# Altium PCB PCB_mezzanine_analog_template.PcbDoc (part 1 of 2)
Units mm, origin at the board's own origin, x right, y up, seen from the top; angles counter-clockwise.
Board outline 100.05 x 34.55 mm, 4 copper layers (Component Side, Ground Plane, Power Plane, Solder Side), stack 1.013 mm thick; 137 components, 101 nets, 470 pads, 426 vias.
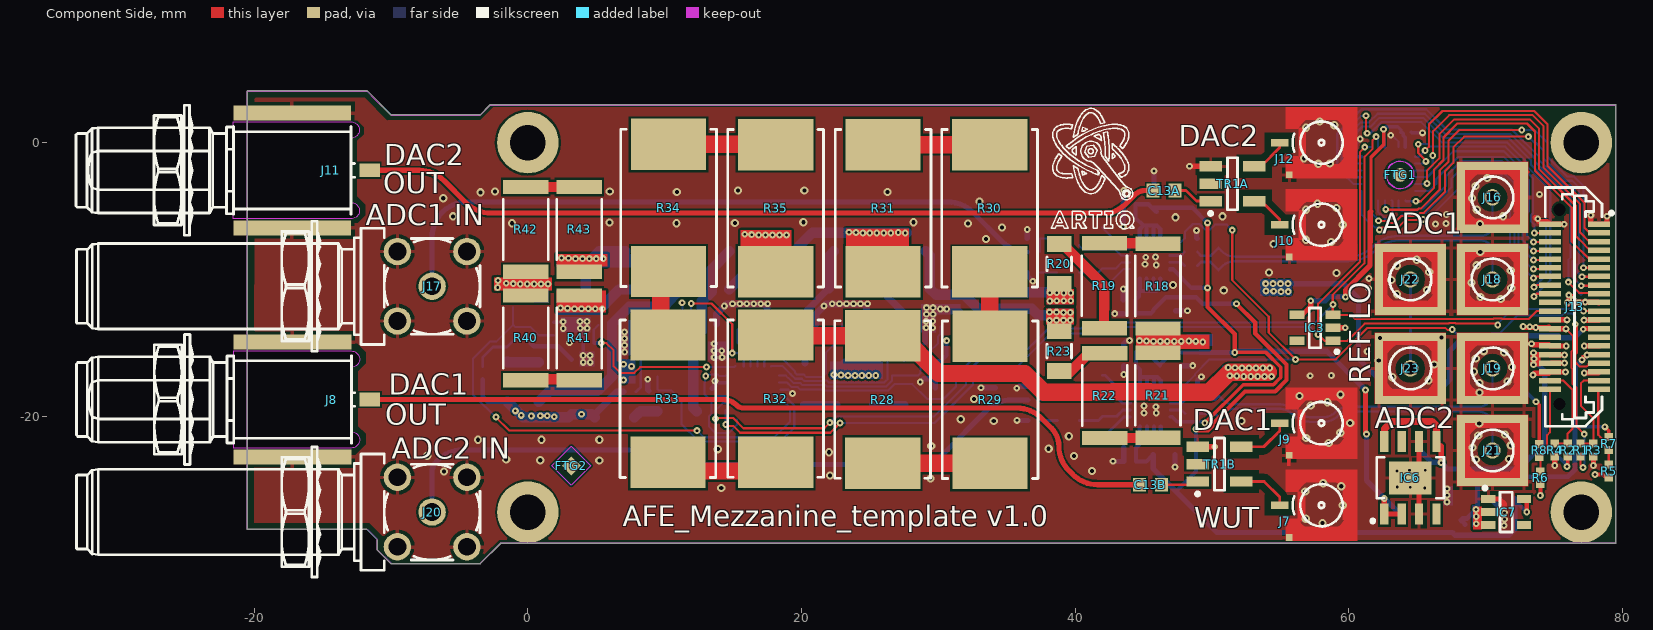
[diagram p0: Component Side view]
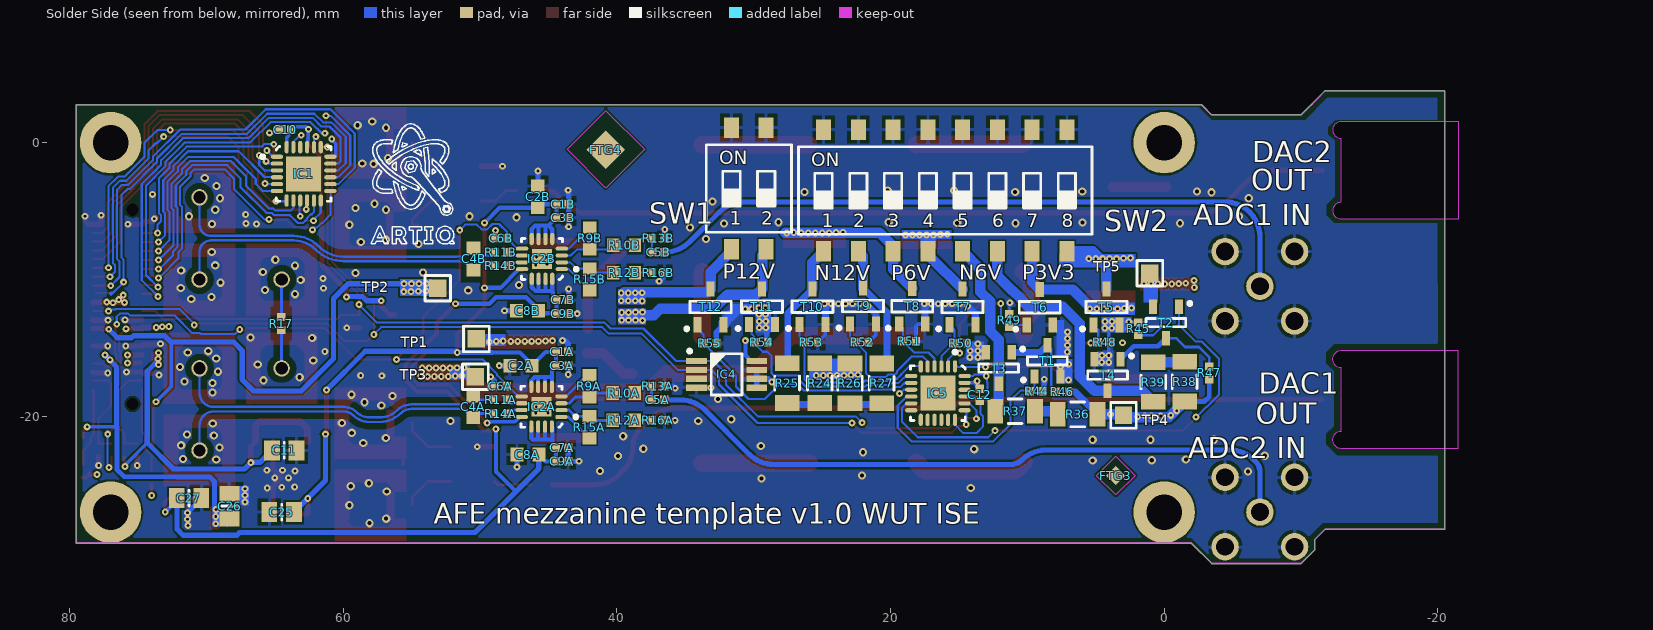
[diagram p1: Solder Side view, seen from below]
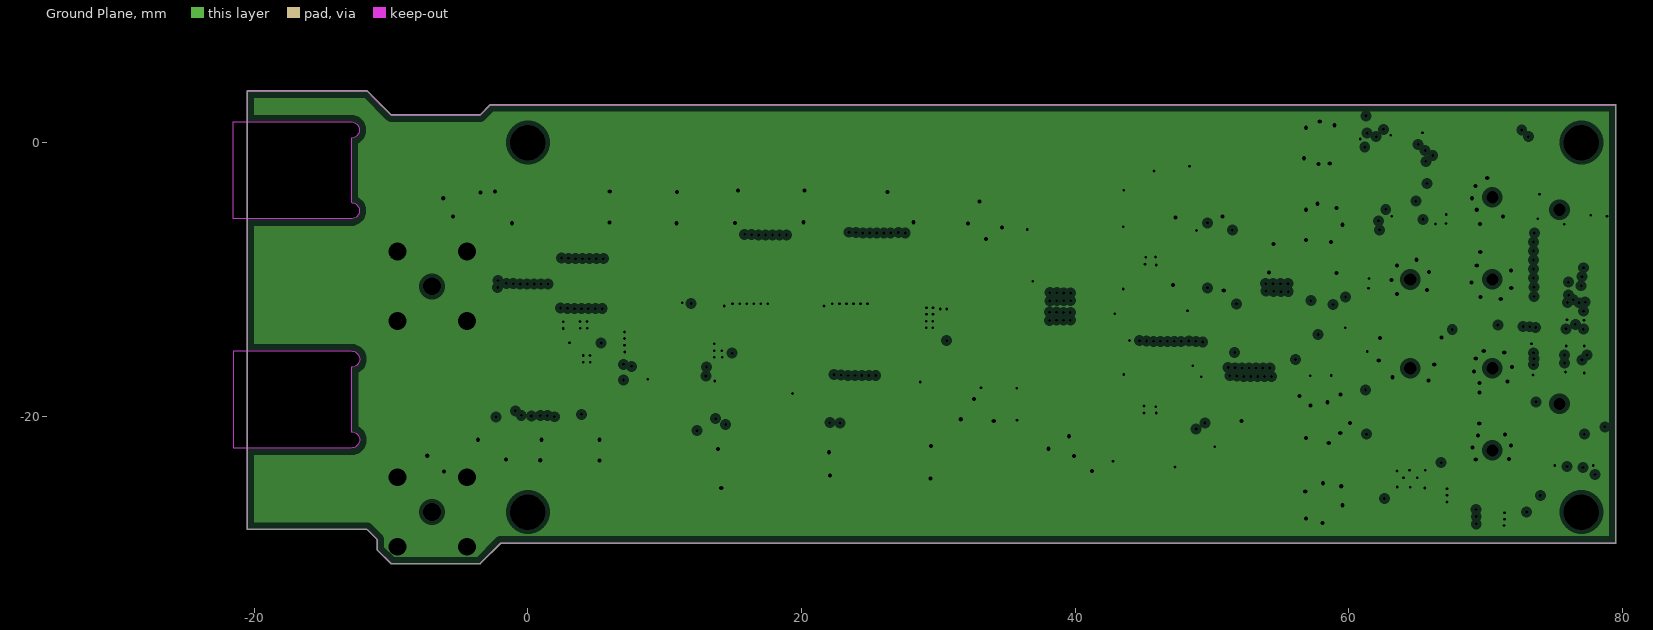
[diagram p2: Ground Plane, clearances drawn from the general rule]
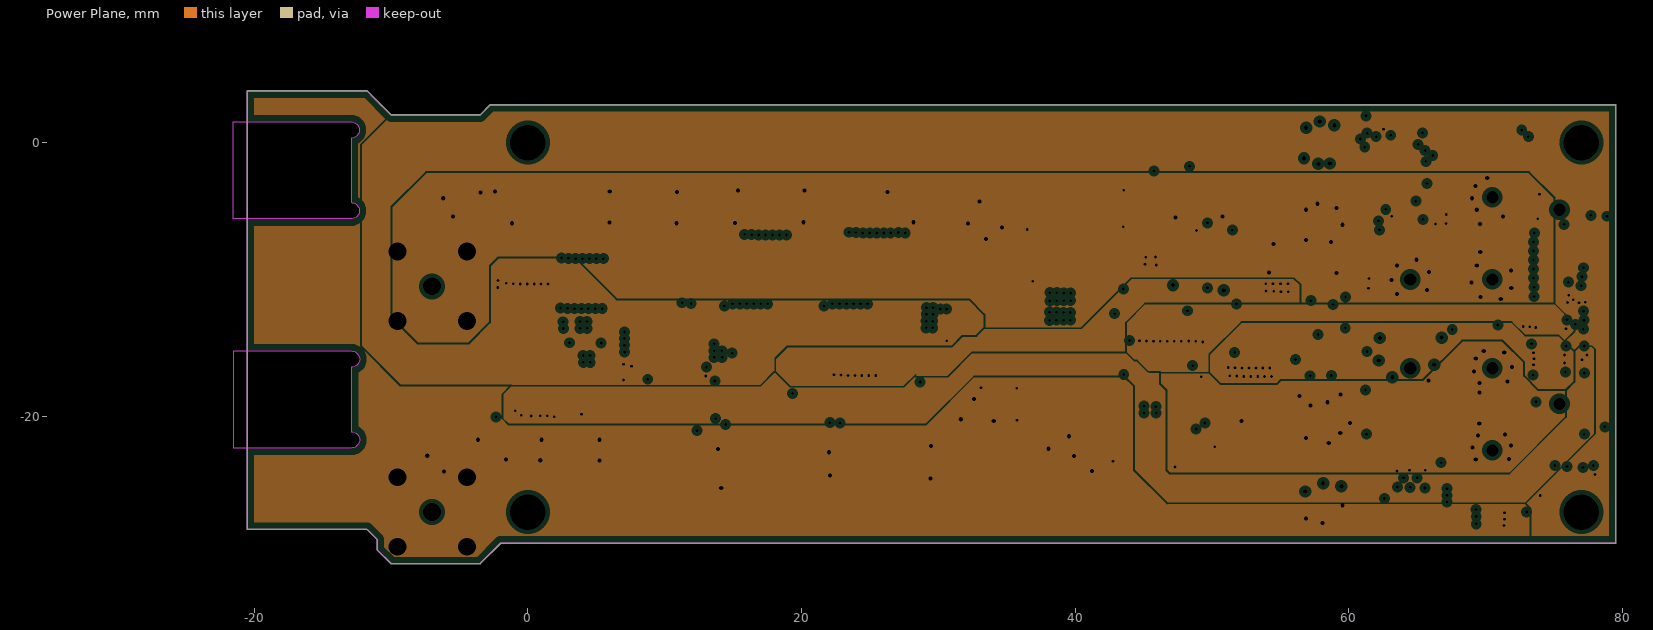
[diagram p3: Power Plane, clearances drawn from the general rule]
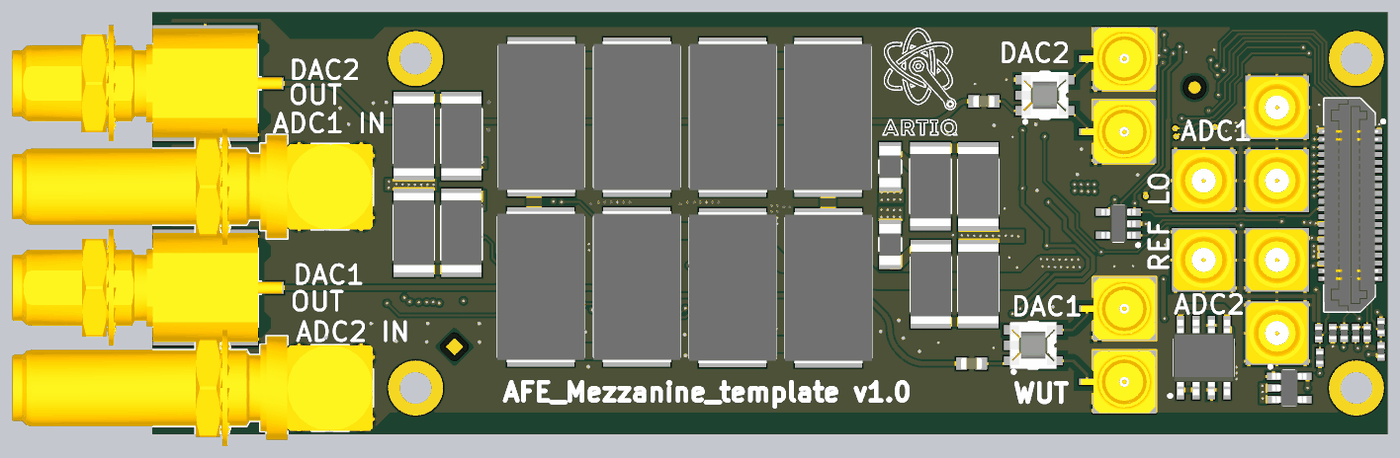
[diagram p5: 3D render of the assembled board from above, using the file's embedded part models]
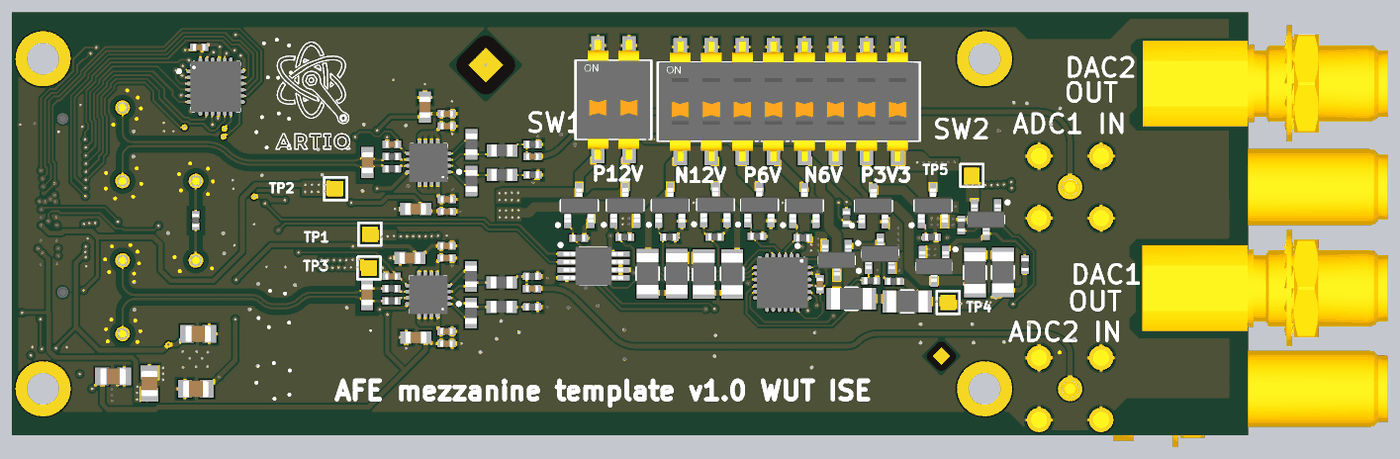
[diagram p6: 3D render of the assembled board from below, using the file's embedded part models]

## Layer stack, top to bottom
Top Solder: solder mask 0.0102, Solder Resist, Dk 3.5
Component Side: signal copper 0.035
Dielectric 1: core 0.2605, FR-4, Dk 4.8
Ground Plane: plane copper 0.035, net GND
Dielectric 3: prepreg 0.352, Dk 4.2
Power Plane: plane copper 0.035, net (Multiple Nets)
Dielectric 4: core 0.2605, Dk 4.2
Solder Side: signal copper 0.035
Bottom Solder: solder mask 0.0102, Solder Resist, Dk 3.5

## Board outline
-11.761,-28.275 -11.025,-29.011 -11.025,-29.75 ccw(c-11,-29.75) -11.018,-29.768 -10.018,-30.768 cw(c-10,-30.75) -10.018,-30.768 ccw(c-10,-30.75) -10,-30.775 -3.5,-30.775 ccw(c-3.5,-30.75) -3.482,-30.768 -1.989,-29.275 79.5,-29.275 ccw(c79.5,-29.25) 79.525,-29.25 79.525,2.75 ccw(c79.5,2.75) 79.5,2.775 -2.75,2.775 ccw(c-2.75,2.75) -2.768,2.768 cw(c-2.75,2.75) -2.768,2.768 -3.511,2.025 -9.989,2.025 -11.732,3.768 cw(c-11.75,3.75) -11.732,3.768 ccw(c-11.75,3.75) -11.75,3.775 -20.5,3.775 ccw(c-20.5,3.75) -20.525,3.75 -20.525,-28.25 ccw(c-20.5,-28.25) -20.5,-28.275

## Design rules (kind name [scope] priority, off if disabled: settings)
Clearance Clearance_1 [(InDifferentialPairClass('All Differential Pairs')) vs InNet('GND')] p1: gap=0.254 except(0.457: Arc-Poly Track-Poly SMDPad-Poly THPad-Poly)
Clearance [All] p2: gap=0.152
DiffPairsRouting [All] p1: maxlimit=0.254 minlimit=0.152 mostfreqgap=0.152 toplayer_minwidth=0.178 toplayer_maxwidth=0.381 toplayer_prefwidth=0.178 bottomlayer_minwidth=0.178 bottomlayer_maxwidth=0.381 bottomlayer_prefwidth=0.178 maxuncoupledlength=12.7
HoleSize [All] p1: absolutevalues=TRUE maxlimit=5 minlimit=0.2 maxpercent=80.000 minpercent=20.000
HoleToHoleClearance [All] p1: gap=0.2 allowstackedmicrovias=TRUE
MinimumSolderMaskSliver [All] p1 off: minsoldermaskwidth=0.05
PlaneClearance [All] p1: clearance=0.3
PlaneConnect [All] p1: planeconnectstyle=Direct reliefexpansion=0.508 reliefentries=4 reliefconductorwidth=0.254 reliefairgap=0.254
PolygonConnect PolygonConnect_pad [(InPadClass('All Pads'))] p1: connectstyle=Relief reliefconductorwidth=0.254 reliefentries=4 polygonreliefangle="90 Angle" airgapwidth=0.254
PolygonConnect [All] p2: connectstyle=Direct reliefconductorwidth=0.254 reliefentries=4 polygonreliefangle="45 Angle" airgapwidth=0.254
RoomDefinition PCB_mezzanine_analog_template [InComponentClass('PCB_mezzanine_analog_template ')] p1 off: confinementstyle=ConfineIn formatcopy=TRUE lockcomponents=FALSE outline 80.669,-29.387 108.634,-29.387 108.634,-20.903 80.669,-20.903
RoomDefinition U_ADC_channel2 [InComponentClass('U_ADC_channel2')] p2 off: confinementstyle=ConfineIn formatcopy=TRUE lockcomponents=FALSE outline 34.97,-3.5 52.97,-3.5 52.97,-13.5 34.97,-13.5
RoomDefinition U_ADC_channel1 [InComponentClass('U_ADC_channel1')] p3 off: confinementstyle=ConfineIn formatcopy=TRUE lockcomponents=FALSE outline 35,-14.3 53,-14.3 53,-24.3 35,-24.3
RoomDefinition U_DAC_channel2 [InComponentClass('U_DAC_channel2')] p4 off: confinementstyle=ConfineIn formatcopy=TRUE lockcomponents=FALSE outline 2.55,-30 53.55,-30 53.55,-18 2.55,-18
RoomDefinition U_DAC_channel1 [InComponentClass('U_DAC_channel1')] p5 off: confinementstyle=ConfineIn formatcopy=TRUE lockcomponents=FALSE outline 3.5,-9.5 54.5,-9.5 54.5,2.5 3.5,2.5
RoutingVias [All] p1: holewidth=0.2 width=0.5 viastyle="Through Hole" minholewidth=0.2 minwidth=0.5 maxholewidth=0.711 maxwidth=1.27
SilkToSilkClearance [All] p1: silktosilkclearance=0
SilkToSolderMaskClearance SilkscreenOverComponentPads [IsPad] p1: minsilkscreentomaskgap=0 clearancetoexposedcopper=TRUE
SolderMaskExpansion [All] p1: expansion=0.102
Width [All] p1: maxlimit=2.54 minlimit=0.127 preferedwidth=0.254
22 further rules are at their usual default settings.

## Classes and differential pairs
component class PCB_mezzanine_analog_template: C10 C11 C12 C25 C26 C27 FTG1 FTG2 FTG3 FTG4 IC1 IC3 IC4 IC5 IC6 IC7 J7 J8 J9 J10 J11 J12 J13 J16 J17 J18 J19 J20 J21 J22 J23 R1 R2 R3 R4 R5 R6 R7 R8 R17 R18 R19 R20 R21 R22 R23 R24 R25 R26 R27 R28 R29 R30 R31 R32 R33 R34 R35 R36 R37 R38 R39 R40 R41 R42 R43 R44 R45 R46 R47 R48 R49 R50 R51 R52 R53 R54 R55 SW1 SW2 T1 T2 T3 T4 T5 T6 T7 T8 T9 T10 T11 T12 TP1 TP2 TP3 TP4 TP5
channel class ADC_channel: U_ADC_channel1 U_ADC_channel2
channel class DAC_channel: U_DAC_channel1 U_DAC_channel2
component class U_ADC_channel1: C1A C2A C3A C4A C5A C6A C7A C8A C9A IC2A R9A R10A R11A R12A R13A R14A R15A R16A
component class U_ADC_channel2: C1B C2B C3B C4B C5B C6B C7B C8B C9B IC2B R9B R10B R11B R12B R13B R14B R15B R16B
component class U_DAC_channel1: C13A TR1A
component class U_DAC_channel2: C13B TR1B
differential pair ADC1_IN: +ADC1_IN_P -ADC1_IN_N
differential pair ADC2_IN: +ADC2_IN_P -ADC2_IN_N
differential pair DAC1_OUT: +DAC1_OUT_P -DAC1_OUT_N
differential pair DAC2_OUT: +DAC2_OUT_P -DAC2_OUT_N
differential pair LO_IN: +LO_IN_P -LO_IN_N

## Components (designator, comment, footprint, x,y, rotation, side; value= is the part's Value field where it differs from the comment)
C1A "100nF" CAPC1005X55N 44,-15.3 r0 bottom (schematic designator C1)
C1B "100nF" CAPC1005X55N 43.97,-4.5 r0 bottom (schematic designator C1)
C2A "10uF" CAPC1608X87N 47,-16.3 r180 bottom (schematic designator C2)
C2B "10uF" CAPC1608X87N 45.769,-3.957 r270 bottom (schematic designator C2)
C3A "1nF" CAPC1005X55N 44,-16.3 r0 bottom (schematic designator C3)
C3B "1nF" CAPC1005X55N 43.97,-5.5 r0 bottom (schematic designator C3)
C4A "10pF" CAPC1608X87N 50.5,-19.3 r90 bottom (schematic designator C4)
C4B "10pF" CAPC1608X87N 50.47,-8.5 r90 bottom (schematic designator C4)
C5A "100nF" CAPC1005X55N 37,-18.8 r180 bottom (schematic designator C5)
C5B "100nF" CAPC1005X55N 36.97,-8 r180 bottom (schematic designator C5)
C6A "100nF" CAPC1005X55N 48.5,-17.8 r180 bottom (schematic designator C6)
C6B "100nF" CAPC1005X55N 48.47,-7 r180 bottom (schematic designator C6)
C7A "100nF" CAPC1005X55N 44,-22.3 r0 bottom (schematic designator C7)
C7B "100nF" CAPC1005X55N 43.97,-11.5 r0 bottom (schematic designator C7)
C8A "10uF" CAPC1608X87N 46.5,-22.8 r180 bottom (schematic designator C8)
C8B "10uF" CAPC1608X87N 46.531,-12.288 r180 bottom (schematic designator C8)
C9A "1nF" CAPC1005X55N 44,-23.3 r0 bottom (schematic designator C9)
C9B "1nF" CAPC1005X55N 43.97,-12.5 r0 bottom (schematic designator C9)
C10 "100nF" CAPC1005X55N 64.235,0.945 r180 bottom
C11 "1uF" CAPC2012X140N 64.311,-22.499 r0 bottom
C12 "100nF" CAPC1005X55N 13.46,-18.429 r270 bottom
C13A "100nF" CAPC1608X87N 46.5,-3.5 r0 top (schematic designator C13)
C13B "100nF" CAPC1608X87N 45.5,-25 r0 top (schematic designator C13)
C25 "1uF" CAPC2012X140N 64.5,-27 r180 bottom
C26 "1uF" CAPC2012X140N 68.299,-26.563 r270 bottom
C27 "1uF" CAPC2012X140N 71.27,-25.98 r0 bottom
FTG1 "Use only in PCB" FIDUCIAL_TOP_C100-200 63.754,-2.362 r90 top
FTG2 "Use only in PCB" FIDUCIAL_TOP_S100-200 3.175,-23.622 r90 top
FTG3 "Use only in PCB" FIDUCIAL_TOP_S100-200 3.531,-24.333 r90 bottom
FTG4 "Use only in PCB" FIDUCIAL_TOP_S200-400 40.792,-0.508 r180 bottom
IC1 "TCA9539RTWR" QFN50P400X400X80-25N-S255 62.888,-2.281 r180 bottom
IC2A "ADA4927-1YCPZ-R2" QFN50P300X300X100-17N-S145 45.5,-19.3 r0 bottom (schematic designator IC2)
IC2B "ADA4927-1YCPZ-R2" QFN50P300X300X100-17N-S145 45.47,-8.5 r0 bottom (schematic designator IC2)
IC3 "24AA02E48T-I/OT" SOT95P280X145-5N 57.529,-13.533 r180 top
IC4 "LM75AIMM/NOPB" SOP65P490X109-8N 31.977,-16.937 r180 bottom
IC5 "TCA9539RTWR" QFN50P400X400X80-25N-S255 16.533,-18.308 r270 bottom
IC6 "ADP7102ARDZ-5.0-R7" SOIC127P600X175-9N-R241X309 64.5,-24.5 r90 top
IC7 "ADP7182AUJZ-5.0-R7" SOT95P280X90-5N 71.5,-27 r0 top
J7 "SMP" MOLEX_85305-0232 58,-26.5 r90 top locked
J8 "SMA" TELEGARTNER_J01151A0451 -11.55,-18.776 r180 top
J9 "SMP" MOLEX_85305-0232 58,-20.5 r90 top locked
J10 "SMP" MOLEX_85305-0232 58,-6 r90 top locked
J11 "SMA" TELEGARTNER_J01151A0451 -11.575,-2.025 r180 top
J12 "SMP" MOLEX_85305-0232 58,0 r90 top locked
J13 "Familly" SAMTEC_LSS-120-03-L-DV-A 76.5,-12 r90 top
J16 "SMP" AMPHENOL_SMP-MSLD-PCT-10 70.5,-4 r0 top
J17 "SMA" TELEGARTNER_J01151A0921 -7,-10.5 r0 top
J18 "SMP" AMPHENOL_SMP-MSLD-PCT-10 70.5,-10 r0 top
J19 "SMP" AMPHENOL_SMP-MSLD-PCT-10 70.5,-16.5 r0 top
J20 "SMA" TELEGARTNER_J01151A0921 -7,-27 r0 top
J21 "SMP" AMPHENOL_SMP-MSLD-PCT-10 70.5,-22.5 r0 top
J22 "SMP" AMPHENOL_SMP-MSLD-PCT-10 64.5,-10.003 r0 top locked
J23 "SMP" AMPHENOL_SMP-MSLD-PCT-10 64.5,-16.5 r0 top
R1 "10k" RESC1005X40N 76.935,-22.474 r270 top
R2 "10k" RESC1005X40N 75.995,-22.474 r270 top
R3 "1k" RESC1005X40N 77.874,-22.474 r90 top
R4 "1k" RESC1005X40N 75.055,-22.474 r90 top
R5 "1k" RESC1005X40N 79,-24 r90 top
R6 "1k" RESC1005X40N 74,-24.5 r90 top
R7 "10k" RESC1005X40N 79,-22 r90 top
R8 "10k" RESC1005X40N 73.912,-22.499 r90 top
R9A "332" RESC1608X55N 42,-17.8 r90 bottom (schematic designator R9)
R9B "332" RESC1608X55N 41.97,-7 r90 bottom (schematic designator R9)
R10A "332" RESC1608X55N 39.5,-18.3 r0 bottom (schematic designator R10)
R10B "332" RESC1608X55N 39.47,-7.5 r0 bottom (schematic designator R10)
R11A "49R9" RESC1005X40N 48.5,-18.8 r180 bottom (schematic designator R11)
R11B "49R9" RESC1005X40N 48.47,-8 r180 bottom (schematic designator R11)
R12A "332" RESC1608X55N 39.5,-20.3 r0 bottom (schematic designator R12)
R12B "332" RESC1608X55N 39.47,-9.5 r0 bottom (schematic designator R12)
R13A "56" RESC1005X40N 37,-17.8 r0 bottom (schematic designator R13)
R13B "56" RESC1005X40N 36.97,-7 r0 bottom (schematic designator R13)
R14A "49R9" RESC1005X40N 48.5,-19.8 r180 bottom (schematic designator R14)
R14B "49R9" RESC1005X40N 48.47,-9 r180 bottom (schematic designator R14)
R15A "332" RESC1608X55N 42,-20.8 r270 bottom (schematic designator R15)
R15B "332" RESC1608X55N 41.97,-10 r270 bottom (schematic designator R15)
R16A "56" RESC1005X40N 37,-20.3 r0 bottom (schematic designator R16)
R16B "56" RESC1005X40N 36.97,-9.5 r0 bottom (schematic designator R16)
R17 "100" RESC1005X40N 64.514,-13.228 r90 bottom
R18 "56" RESC6331X70N 46.048,-10.485 r90 top
R19 "56" RESC6331X70N 42.137,-10.46 r270 top
R20 "8R2" RESC3216X65N 38.835,-8.859 r270 top
R21 "56" RESC6331X70N 46.048,-18.462 r270 top
R22 "56" RESC6331X70N 42.162,-18.487 r90 top
R23 "8R2" RESC3216X65N 38.835,-15.235 r90 top
R24 "120" RESC3216X65N 25.169,-17.572 r270 bottom
R25 "120" RESC3216X65N 27.557,-17.572 r90 bottom
R26 "120" RESC3216X65N 22.96,-17.595 r270 bottom
R27 "120" RESC3216X65N 20.648,-17.597 r90 bottom
R28 "2" RESM11670X449N 25.931,-18.776 r270 top
R29 "2" RESM11670X449N 33.78,-18.791 r90 top
R30 "2" RESM11670X449N 33.755,-4.795 r90 top
R31 "2" RESM11670X449N 25.957,-4.795 r270 top
R32 "2" RESM11670X449N 18.108,-18.715 r270 top
R33 "2" RESM11670X449N 10.234,-18.716 r90 top
R34 "2" RESM11670X449N 10.285,-4.77 r90 top
R35 "2" RESM11670X449N 18.108,-4.795 r270 top
R36 "62" RESC3216X65N 6.323,-19.858 r0 bottom
R37 "62" RESC3216X65N 10.895,-19.629 r0 bottom
R38 "62" RESC3216X65N -1.501,-17.47 r90 bottom
R39 "62" RESC3216X65N 0.785,-17.495 r270 bottom
R40 "3R3" RESC6331X70N -0.154,-14.271 r270 top
R41 "3R3" RESC6331X70N 3.757,-14.271 r90 top
R42 "3R3" RESC6331X70N -0.154,-6.345 r90 top
R43 "3R3" RESC6331X70N 3.757,-6.345 r270 top
R44 "10k" RESC1005X40N 9.32,-18.156 r180 bottom
R45 "10k" RESC1005X40N 1.903,-13.609 r90 bottom
R46 "10k" RESC1005X40N 7.44,-18.207 r180 bottom
R47 "10k" RESC1005X40N -3.304,-16.835 r270 bottom
R48 "10k" RESC1005X40N 4.341,-14.6 r180 bottom
R49 "10k" RESC1005X40N 11.301,-13 r90 bottom
R50 "10k" RESC1005X40N 14.857,-14.651 r180 bottom
R51 "10k" RESC1005X40N 18.616,-14.524 r180 bottom
R52 "10k" RESC1005X40N 22.071,-14.574 r180 bottom
R53 "10k" RESC1005X40N 25.779,-14.6 r180 bottom
R54 "10k" RESC1005X40N 29.411,-14.6 r180 bottom
R55 "10k" RESC1005X40N 33.196,-14.676 r180 bottom
SW1 "Switch" SW_OMRON_A6S-2102-H 30.351,-3.353 r90 bottom
SW2 "Switch" SW_OMRON_A6S-8102-H 16,-3.5 r90 bottom
T1 "IRLML6402PBF" SOT95P237X112-3N 8.532,-15.946 r90 bottom
T2 "IRLML6402PBF" SOT95P237X112-3N -0.129,-13.152 r270 bottom
T3 "IRLML6402PBF" SOT95P237X112-3N 12.088,-16.479 r270 bottom
T4 "IRLML6402PBF" SOT95P237X112-3N 4.128,-16.994 r270 bottom
T5 "DMN2020LSN-7" SOT95P285X140-3N 4.214,-12.014 r90 bottom
T6 "DMN2020LSN-7" SOT95P285X140-3N 9.091,-12.034 r90 bottom
T7 "DMN2020LSN-7" SOT95P285X140-3N 14.73,-12.009 r90 bottom
T8 "DMN2020LSN-7" SOT95P285X140-3N 18.413,-11.958 r90 bottom
T9 "DMN2020LSN-7" SOT95P285X140-3N 22.009,-11.94 r90 bottom
T10 "DMN2020LSN-7" SOT95P285X140-3N 25.703,-11.984 r90 bottom
T11 "DMN2020LSN-7" SOT95P285X140-3N 29.386,-11.984 r90 bottom
T12 "DMN2020LSN-7" SOT95P285X140-3N 33.145,-12.009 r90 bottom
TP1 "Test Point" TPS127 50.265,-14.346 r180 bottom
TP2 "Test Point" TPS127 53.084,-10.637 r180 bottom
TP3 "Test Point" TPS127 50.341,-17.114 r180 bottom
TP4 "Test Point" TPS127 2.97,-19.934 r180 bottom
TP5 "Test Point" TPS127 1.039,-9.545 r180 bottom
TR1A "1:1" XFMR_MINI-CIRCUITS_AT224 51.5,-3 r90 top (schematic designator TR1)
TR1B "1:1" XFMR_MINI-CIRCUITS_AT224 50.55,-23.5 r90 top (schematic designator TR1)

## Footprints (in the part's own frame and the unit in brackets; to place one, negate y for a bottom-side part, rotate by r counter-clockwise, add the part's x,y. Pads: shape width x height; smd on the part's side, far side on the other; paste and mask are expansions set on the pad)
AMPHENOL_SMP-MSLD-PCT-10 [mm] "50 Ohm RF Connector, SMP Straight PCB Jack, Limited Detent, Surface Mount with Thru-Hole Contact"
  round 1.2 hole 0.9: 1(0,0)
  round 1.2 smd: 1(0,0)
  rect 0.6x5.2 smd: 2(-2.3,0) 2(2.3,0)
  rect 5.2x0.6 smd: 2(0,-2.3) 2(0,2.3)
  Component Side region: -2.6,-2.6 0,-2.6 0,-2 -0.868,-1.802 -1.564,-1.247 -1.95,-0.445 -1.95,0.445 -1.564,1.247 -0.868,1.802 0,2 0,2 0,2.6 -2.6,2.6
  Component Side region: 0,-2.6 2.6,-2.6 2.6,2.6 0,2.6 0,2 0.868,1.802 1.564,1.247 1.95,0.445 1.95,-0.445 1.564,-1.247 0.868,-1.802 0,-2 0,-2
  silkscreen extent -1.52,-1.52 1.53,1.52, body extent -2.5,-2.5 2.5,2.5, height 4.09
CAPC1005X55N [mm] "Chip Capacitor, Body 1.0x0.55mm, IPC Medium Density"
  rect 0.62x0.62 smd: 1(-0.45,0) 2(0.45,0)
  body extent -0.52,-0.27 0.53,0.28, height 0.55
CAPC1608X87N [mm] "Chip Capacitor, Body 1.6x0.8mm IPC Medium Density"
  rect 0.95x1 smd: 1(-0.8,0) 2(0.8,0)
  body extent -0.87,-0.47 0.88,0.48, height 0.87
CAPC2012X140N [mm] "Chip Capacitor, Body 2.0x1.25mm, IPC Medium Density"
  rect 1.15x1.45 smd: 1(-0.9,0) 2(0.9,0)
  silkscreen extent 0,-0.58 0,0.58, body extent -1.05,-0.67 1.05,0.68, height 1.3
FIDUCIAL_TOP_C100-200 [mm] "Round Fiducial Target, Top Layer, 1.0mm, Top Solder 2.0mm, Keepout =2.0mm"
  round 1 smd paste-0.51 mask+0.5: FTG2(0,0)
  Component Side keep-out circle w0.1: c0,0 r1
FIDUCIAL_TOP_S100-200 [mm] "Square Fiducial Target, Top Layer, 1.0mm, Top Solder 2.0mm, Keepout =2.0mm"
  rect 1x1 smd rot 45 paste-0.51 mask+0.5: 1(0,0)
  Component Side keep-out region: 1.414,0 0,-1.414 -1.414,0 0,1.414
FIDUCIAL_TOP_S200-400 [mm] "Square Fiducial Target, Top Layer, 2.0mm, Top Solder 4.0mm, Keepout =4.0mm"
  rect 2x2 smd rot 45 paste-0.9 mask+1: 1(0,0)
  Component Side keep-out region: -2.839,0.011 -0.011,2.839 2.818,0.011 -0.011,-2.818
MOLEX_85305-0232 [mm] "50 Ohms, SMP Surface Mount Plug, Limited Detent"
  rect 0.54x1.3 smd: 1(0,3.05)
  rect 0.5x0.5 smd paste-0.25 mask-0.25: 2(-2.35,2.35)
  Component Side region: -2.6,-2.6 -2.6,2.6 -1,2.6 -1,1.732 -1.732,1 -2,0 -1.732,-1 -1,-1.732 0,-2 1,-1.732 1.732,-1 2,0 1.732,1 1,1.732 1,1.732 1,2.6 2.6,2.6 2.6,-2.6
  silkscreen extent -1.55,-1.55 1.55,2.1, body extent -2.54,-2.54 2.54,3.54, height 4.1
QFN50P300X300X100-17N-S145 [mm] "QFN,0.50mm Pitch, Square; 4 Pin X 4 Pin, 3mm X 3mm X 1.00mm H Body (w/Thermal Tab 1.45 X 1.45mm), IPC Medium Density"
  oval 0.9x0.3 smd: 1(-1.45,0.75) 2(-1.45,0.25) 3(-1.45,-0.25) 4(-1.45,-0.75) 9(1.45,-0.75) 10(1.45,-0.25) 11(1.45,0.25) 12(1.45,0.75)
  oval 0.3x0.9 smd: 5(-0.75,-1.45) 6(-0.25,-1.45) 7(0.25,-1.45) 8(0.75,-1.45) 13(0.75,1.45) 14(0.25,1.45) 15(-0.25,1.45) 16(-0.75,1.45)
  rect 1.45x1.45 smd: 17(0,0)
  silkscreen extent -2.62,-1.5 1.5,1.5, body extent -1.57,-1.57 1.58,1.58, height 1
QFN50P400X400X80-25N-S255 [mm] "QFN, 0.50mm Pitch, Square; 6 Pin X 6 Pin, 4mm X 4mm Body (w/Thermal Tab 2.55 X 2.55 mm), IPC Medium Density"
  oval 0.9x0.3 smd: 1(-1.95,1.25) 2(-1.95,0.75) 3(-1.95,0.25) 4(-1.95,-0.25) 5(-1.95,-0.75) 6(-1.95,-1.25) 13(1.95,-1.25) 14(1.95,-0.75) 15(1.95,-0.25) 16(1.95,0.25) 17(1.95,0.75) 18(1.95,1.25)
  oval 0.3x0.9 smd: 7(-1.25,-1.95) 8(-0.75,-1.95) 9(-0.25,-1.95) 10(0.25,-1.95) 11(0.75,-1.95) 12(1.25,-1.95) 19(1.25,1.95) 20(0.75,1.95) 21(0.25,1.95) 22(-0.25,1.95) 23(-0.75,1.95) 24(-1.25,1.95)
  rect 2.55x2.55 smd: 25(0,0)
  silkscreen extent -3.13,-2 2,2, body extent -2.07,-2.07 2.08,2.08, height 0.8
RESC1005X40N [mm] "Chip Resistor, EIA 0402, Metric 1005, Body 1.0x0.5mm, IPC Medium Density"
  rect 0.58x0.62 smd: 1(-0.47,0) 2(0.47,0)
  body extent -0.52,-0.27 0.53,0.28, height 0.4
RESC1608X55N [mm] "Chip Resistor, EIA 0603, Metric 1608, Body 1.6x0.8mm, IPC Medium Density"
  rect 0.9x1 smd: 1(-0.8,0) 2(0.8,0)
  body extent -0.87,-0.47 0.88,0.48, height 0.55
RESC3216X65N [mm] "Chip Resistor, EIA 1206, Metric 3216, Body 3.2x1.6mm, IPC Medium Density"
  rect 1.15x1.8 smd: 1(-1.45,0) 2(1.45,0)
  silkscreen extent -0.5,-0.9 0.5,0.9, body extent -1.67,-0.87 1.68,0.88, height 0.65
RESC6331X70N [mm] "Chip Resistor, EIA 2512, Metric 6331, 2-Leads, Body 6.3x3.1mm, IPC Medium Density"
  rect 1.05x3.3 smd: 1(-3.1,0) 2(3.1,0)
  silkscreen extent -2.2,-1.65 2.2,1.65, body extent -3.25,-1.65 3.25,1.65, height 0.7
RESM11670X449N [mm] "Resistor, Molded Body; 11.56mm L X 6.98mm W X 4.49mm H, IPC Medium Density"
  rect 3.75x5.5 smd: 1(-4.65,0) 2(4.65,0)
  silkscreen extent -5.75,-3.5 5.75,3.5, body extent -6.19,-3.55 6.19,3.55, height 4.49
SAMTEC_LSS-120-03-L-DV-A [mm] "40 Contacts, Pitch 0.635mm, Razor Beam LSS Vertical High Speed Hermaphroditic Strip (Lead Style 5.49mm)"
  rect 0.4x1.6 smd: 1(6.032,-1.8) 2(6.032,1.8) 3(5.397,-1.8) 4(5.397,1.8) 5(4.763,-1.8) 6(4.763,1.8) 7(4.127,-1.8) 8(4.127,1.8) 9(3.492,-1.8) 10(3.492,1.8) 11(2.857,-1.8) 12(2.857,1.8) 13(2.222,-1.8) 14(2.222,1.8) 15(1.588,-1.8) 16(1.587,1.8) 17(0.953,-1.8) 18(0.952,1.8) 19(0.318,-1.8) 20(0.317,1.8) 21(-0.317,-1.8) 22(-0.318,1.8) 23(-0.952,-1.8) 24(-0.953,1.8) 25(-1.587,-1.8) 26(-1.588,1.8) 27(-2.222,-1.8) 28(-2.222,1.8) 29(-2.857,-1.8) 30(-2.857,1.8) 31(-3.492,-1.8) 32(-3.492,1.8) 33(-4.127,-1.8) 34(-4.127,1.8) 35(-4.763,-1.8) 36(-4.763,1.8) 37(-5.397,-1.8) 38(-5.397,1.8) 39(-6.032,-1.8) 40(-6.032,1.8)
  round 0.5 hole 0.9 unplated mask+0.2: P1(-7.1,1.1) P2(7.1,1.1)
  silkscreen extent -8.72,-2.83 8.72,2.14, body extent -8.72,-2.3 8.73,2.3, height 5.3
SOIC127P600X175-9N-R241X309 [mm] "SOIC 8, Pitch 1.27mm - Body 3.9x4.9mm, (w/thermal tab 2.41mm X 3.098mm), IPC Medium Density"
  rect 1.55x0.6 smd: 1(-2.65,1.905) 2(-2.65,0.635) 3(-2.65,-0.635) 4(-2.65,-1.905) 5(2.65,-1.905) 6(2.65,-0.635) 7(2.65,0.635) 8(2.65,1.905)
  rect 2.41x3.098 smd: 9(0,0)
  silkscreen extent -3.27,-2.45 1.5,2.87, body extent -3.1,-2.5 3.1,2.5, height 1.75
SOP65P490X109-8N [mm] "SOP, 0.65mm pitch; 8 pin,3.00mm W X 3.00mm L X 1.09mm H bodyI, PC Medium Density"
  rect 1.5x0.45 smd: 1(-2.2,0.975) 2(-2.2,0.325) 3(-2.2,-0.325) 4(-2.2,-0.975) 5(2.2,-0.975) 6(2.2,-0.325) 7(2.2,0.325) 8(2.2,0.975)
  silkscreen extent -2.83,-1.5 1.12,1.82, body extent -2.45,-1.55 2.45,1.55, height 1.09
SOT95P237X112-3N [mm] "SOT, 0.95mm, pitch; 3 pin,1.30mm W X 2.92mm L X 1.12mm H body, IPC Medium Density"
  rect 1.05x0.6 smd: 1(-1.15,0.95) 2(-1.15,-0.95) 3(1.15,0)
  silkscreen extent -1.52,-1.45 0.3,1.88, body extent -1.25,-1.5 1.25,1.5, height 1.1
SOT95P280X90-5N [mm] "SOT, 0.95mm Pitch; 5 Pin, 1.60mm W X 2.90mm L X 0.90mm H body, IPC Medium"
  rect 1.05x0.6 smd: 1(-1.3,0.95) 2(-1.3,0) 3(-1.3,-0.95) 4(1.3,-0.95) 5(1.3,0.95)
  silkscreen extent -1.67,-1.45 0.45,1.87, body extent -1.4,-1.5 1.4,1.5, height 0.9
SOT95P280X145-5N [mm] "SOT, 0.95mm pitch; 5 pin, 1.60mm W X 2.90mm L X 1.45mm H body, IPC Medium Density"
  rect 1.1x0.6 smd: 1(-1.3,0.95) 2(-1.3,0) 3(-1.3,-0.95) 4(1.3,-0.95) 5(1.3,0.95)
  silkscreen extent -1.73,-1.45 0.43,1.87, body extent -1.4,-1.5 1.4,1.5, height 1.45
SOT95P285X140-3N [mm] "SOT23, 0.95mm Pitch; 3 Pin, 1.6mm W X 3mm L X 1.4mm H Body, IPC Medium Density"
  rect 1.1x0.6 smd: 1(-1.3,0.95) 2(-1.3,-0.95) 3(1.3,0)
  silkscreen extent -1.72,-1.5 0.43,1.88, body extent -1.4,-1.5 1.4,1.5, height 1.4
SW_OMRON_A6S-2102-H [mm] "Pitch 2.54mm, Body 6.2x6.4mm, 2 Ways SPST Surface-Mounting DIP Switch, OMRON A6S-H"
  rect 1.5x1.1 smd: 1(-4.45,1.27) 2(-4.45,-1.27) 3(4.45,-1.27) 4(4.45,1.27)
  silkscreen extent -3.2,-3.11 3.2,3.11, body extent -4.9,-3.01 4.9,3.01, height 3.97
SW_OMRON_A6S-8102-H [mm] "Pitch 2.54mm, Body 21.5x6.4mm, 8 Ways SPST Surface-Mounting DIP Switch, OMRON A6S-H"
  rect 1.5x1.1 smd: 1(-4.45,8.89) 2(-4.45,6.35) 3(-4.45,3.81) 4(-4.45,1.27) 5(-4.45,-1.27) 6(-4.45,-3.81) 7(-4.45,-6.35) 8(-4.45,-8.89) 9(4.45,-8.89) 10(4.45,-6.35) 11(4.45,-3.81) 12(4.45,-1.27) 13(4.45,1.27) 14(4.45,3.81) 15(4.45,6.35) 16(4.45,8.89)
  silkscreen extent -3.2,-10.73 3.2,10.73, body extent -4.9,-10.63 4.9,10.63, height 3.85
TELEGARTNER_J01151A0451 [mm] "SMA 50 ohm Edge Mount Bulkhead Jack Receptacle"
  rect 1.5x1 smd: 1(0,0)
  rect 8.6x1.1 smd: 2(5.65,4.2) 2(5.65,-4.2)
  Keep-Out Layer board cut-out: 1.35,-3.55 1.09,-3.491 0.881,-3.324 0.765,-3.084 0.765,-2.816 0.881,-2.576 1.09,-2.409 1.35,-2.35 1.35,-2.35 1.35,2.35 1.09,2.409 0.881,2.576 0.765,2.816 0.765,3.084 0.881,3.324 1.09,3.491 1.35,3.55 1.35,3.55 9.95,3.55 9.95,-3.55
  silkscreen extent 1.1,-4.75 21.45,4.75, body extent -0.65,-4.75 21.45,4.75, height 5.25
TELEGARTNER_J01151A0921 [mm] "50 Ohm SMA Right Angle PCB Jack"
  round 2 hole 1.3: 1(0,0) 2(-2.54,-2.54) 2(-2.54,2.54) 2(2.54,-2.54) 2(2.54,2.54)
  silkscreen extent -26,-4.75 3.5,4.75, body extent -26,-4.75 3.5,4.75, height 11.15
TPS127 [mm] "1.27 x  1.27mm SMD Test Point Area"
  rect 1.27x1.27 smd paste-1.27: 1(0,0)
  silkscreen extent -0.94,-0.94 0.94,0.94
XFMR_MINI-CIRCUITS_AT224 [mm] "MINI-CIRCUITS RF Transformer, Case AT224 - Body 3.81X3.81mm"
  rect 0.76x1.65 smd: 1(-1.27,1.59) 2(0,1.59) 3(1.27,1.59) 4(1.27,-1.59) 6(-1.27,-1.59)
  silkscreen extent -2.3,-0.37 1.91,1.72, body extent -1.9,-1.9 1.91,1.91, height 3.81

## Part data
C1A C1B C5A C5B C6A C6B C7A C7B C10 C12: library part CC0402_100NF_16V_10%_X5R, "Non-polarised capacitor"
C2A C2B C8A C8B: library part CC0603_10UF_6.3V_20%_X5R, "Non-polarised capacitor"
C3A C3B C9A C9B: library part CC0402_1NF_50V_10%_X7R, "Non-polarised capacitor"
C4A C4B: library part CC0603_10PF_50V_5%_NP0, "Non-polarised capacitor"
C11 C25 C26 C27: library part CC0805_1UF_35V_20%_X7R, "Non-polarised capacitor"
C13A C13B: library part CC0603_100NF_50V_10%_X7R, "Non-polarised capacitor"
FTG1: library part FIDUCIAL_TARGET_C100-200, "Fiducial Target"
FTG2 FTG3: library part FIDUCIAL_TARGET_S100-200, "Fiducial Target"
FTG4: library part FIDUCIAL_TARGET_S200-400, "Fiducial Target"
IC1 IC5: "Low-Voltage 16-Bit I2C and SMBus I/O Expander"
IC2A IC2B: "Ultralow Distortion Current Feedback Differential ADC Driver"
IC3: "1.7V-5.5V, 2K I2C Serial EEPROM With EUI-48 Node Identity"
IC4: "Digital Temperature Sensor and Thermal Watchdog with Two-Wire Interface"
IC6: "300 mA, Low Noise, CMOS LDO Linear Regulator"
IC7: "–5V, 200 mA, Low Noise, Linear Regulator"
J7 J9 J10 J12: library part MOLEX_85305-0232
J8 J11: library part TELEGARTNER_J01151A0451
J13: library part SAMTEC_LSS-120-03-L-DV-A, "Connector 40 Hermaphroditic"
J16 J18 J19 J21 J22 J23: library part AMPHENOL_SMP-MSLD-PCT-10
J17 J20: library part TELEGARTNER_J01151A0921
R1 R2 R7 R8 R44 R45 R46 R47 R48 R49 R50 R51 R52 R53 R54 R55: library part R0402_10K_1%_0.0625W_100PPM, "Resistor - 1%"
R3 R4 R5 R6: library part R0402_1K_1%_0.0625W_100PPM, "Resistor - 1%"
R9A R9B R10A R10B R12A R12B R15A R15B: library part R0603_332R_0.1%_0.063W_10PPM, "Resistor - 0.1%"
R11A R11B R14A R14B: library part R0402_49R9_1%_0.0625W_100PPM, "Resistor - 1%"
R13A R13B R16A R16B: library part R0402_56R_1%_0.0625W_100PPM, "Resistor - 1%"
R17: library part R0402_100R_1%_0.0625W_100PPM, "Resistor - 1%"
R18 R19 R21 R22: library part R2512_56R_5%_1W_200PPM, "Resistor - 5%"
R20 R23: library part R1206_8R2_1%_0.25W_200PPM, "Resistor - 1%"
R24 R25 R26 R27: library part R1206_120R_1%_0.25W_100PPM, "Resistor - 1%"
R28 R29 R30 R31 R32 R33 R34 R35: library part R4527_2R_1%_2W_50PPM, "Resistor - 1%"
R36 R37 R38 R39: library part R1206_62R_1%_0.25W_100PPM, "Resistor - 1%"
R40 R41 R42 R43: library part R2512_3R3_1%_1W_200PPM, "Resistor - 1%"
SW1: library part SW_OMRON_A6S-2102-H, "2 Ways SPST DIP Switch"
SW2: library part SW_OMRON_A6S-8102-H, "8 Ways SPST DIP Switch"
T1 T2 T3 T4: "P-CHANNEL MOSFET WITH ZENER DIODE"
T5 T6 T7 T8 T9 T10 T11 T12: "20V, 6.9A, N-Channel Enhancement Mode MOSFET"
TP1 TP2 TP3 TP4 TP5: library part SMD_PAD_1.27X1.27MM
TR1A TR1B: library part XFMR_MINI-CIRCUITS_TC1-1-13M+, "50 Ohms 4.5 To 3000MHz RF Transformers"

## Free pads (board coordinates)
  round 4.5 hole 2.6: 0(0,0) 0(77,0) 1(0,-27) 1(77,-27)

## Via types
v1: diameter 0.5, hole 0.2, Component Side to Solder Side, tented both sides, 307 vias
v2: diameter 0.6, hole 0.3, Component Side to Solder Side, tented both sides, 114 vias
v3: diameter 0.5, hole 0.2, Component Side to Solder Side, 5 vias

## Nets (pads, with @x,y where several pads share a name; then routed paths per layer and width w, separated by ;. In a path a pad name is that pad's centre, name@x,y a point inside that pad or via, vN(x,y) a via of type N, cw(c..) or ccw(c..) an arc to the next point about the centre after c; other vN are vias at no path point)
ADC1_IN_N: C4B.1 J18.1 R14B.1 | length 25
  Solder Side w0.178: C4B.1@50.47,-9.3 C4B.1@50.672,-9.098 ; C4B.1@50.673,-9.097 cw(c51.717,-10.143) 51.717,-8.665 59.973,-8.665 ccw(c59.973,-5.795) 62.003,-7.824 cw(c63.634,-9.456) 62.004,-7.823 cw(c63.634,-9.456) 63.634,-7.149 69.679,-7.149 cw(c69.679,-7.969) 70.5,-7.969 J18.1@70.5,-9.983
  Solder Side w0.203: R14B.1@48.94,-9 49.208,-8.732 49.902,-8.732 C4B.1@50.47,-9.3
ADC1_IN_P: C4B.2 J16.1 R11B.1 | length 25
  Solder Side w0.178: C4B.2@50.47,-7.7 C4B.2@50.672,-7.902 ; C4B.2@50.673,-7.903 ccw(c51.717,-6.857) 51.717,-8.335 59.973,-8.335 ccw(c59.973,-5.795) 61.769,-7.591 61.798,-7.562 cw(c63.594,-9.358) 63.594,-6.818 69.679,-6.818 ccw(c69.679,-5.998) 70.5,-5.998 J16.1@70.5,-3.983
  Solder Side w0.203: R11B.1@48.94,-8 49.215,-8.275 49.895,-8.275 C4B.2@50.47,-7.7
ADC2_IN_N: C4A.1 J21.1 R14A.1 | length 24.7
  Solder Side w0.178: C4A.1@50.5,-20.1 50.834,-19.766 cw(c51.56,-20.491) 51.56,-19.465 55.038,-19.465 cw(c55.038,-20.545) 55.802,-19.781 ccw(c57.335,-18.248) 57.335,-20.416 58.072,-20.416 ccw(c58.072,-18.699) 59.286,-19.913 cw(c59.926,-20.552) 59.926,-19.649 69.467,-19.649 cw(c69.467,-20.682) 70.5,-20.682 J21.1@70.5,-22.483
  Solder Side w0.203: R14A.1@48.97,-19.8 50.2,-19.8 C4A.1@50.5,-20.1
ADC2_IN_P: C4A.2 J19.1 R11A.1 | length 24.7
  Solder Side w0.178: C4A.2@50.5,-18.5 50.834,-18.834 ccw(c51.56,-18.109) 51.56,-19.135 55.038,-19.135 cw(c55.038,-20.545) 56.035,-19.548 ccw(c57.335,-18.248) 57.335,-20.086 58.072,-20.086 ccw(c58.072,-18.699) 59.053,-19.68 cw(c59.926,-20.552) 59.926,-19.318 69.467,-19.318 ccw(c69.467,-18.285) 70.5,-18.285 J19.1@70.5,-16.483
  Solder Side w0.203: R11A.1@48.97,-18.8 50.2,-18.8 C4A.2@50.5,-18.5
ADC_CH0: J13.37 R1.1 R3.2 | length 7.1
  Component Side w0.152: R1.1@76.935,-22.004 R3.2@77.874,-22.004 77.874,-20.131 76.96,-19.217 76.96,-17.598 77.16,-17.397 J13.37@78.3,-17.397
ADC_CH1: J13.38 R2.1 R4.2 | length 7
  Component Side w0.152: J13.38@74.7,-17.397 75.694,-17.397 76.35,-18.054 76.35,-20.899 75.995,-21.255 R2.1@75.995,-22.004 R4.2@75.055,-22.004
ADC_CH2: J13.39 R5.2 R7.1 | length 5.8
  Component Side w0.152: J13.39@78.3,-18.032 78.234,-18.098 78.234,-21.364 78.461,-21.591 78.461,-21.915 78.514,-21.967 78.514,-21.984 R7.1@79,-22.47 R5.2@79,-23.53
ADC_CH3: J13.40 R6.2 R8.1 | length 6.4
  Component Side w0.152: R6.2@74,-24.03 74,-23.057 R8.1@73.912,-22.969 74.496,-22.385 74.496,-21.382 74.7,-21.178 J13.40@74.7,-18.032
DAC1_OUT_N: J9.1 TR1B.4 | length 3.9
  Component Side w0.203: TR1B.4@52.14,-22.23 53.785,-22.23 54.95,-21.065 J9.1@54.95,-20.5
DAC1_OUT_P: J7.1 TR1B.6 | length 3.9
  Component Side w0.203: TR1B.6@52.14,-24.77 53.815,-24.77 54.95,-25.905 J7.1@54.95,-26.5
DAC2_OUT_N: J12.1 TR1A.4 | length 2.8
  Component Side w0.203: TR1A.4@53.09,-1.73 53.584,-1.73 54.95,-0.364 J12.1@54.95,0
DAC2_OUT_P: J10.1 TR1A.6 | length 3.2
  Component Side w0.203: TR1A.6@53.09,-4.27 53.6,-4.27 54.95,-5.62 J10.1@54.95,-6 J10.1@54.57,-6
GND: C1A.1 C1B.1 C2A.1 C2B.1 C3A.1 C3B.1 C6A.1 C6B.1 C7A.1 C7B.1 C8A.1 C8B.1 C9A.1 C9B.1 C10.1 C11.1 C12.1 C25.1 C26.1 C27.1 IC1.9 IC1.18 IC1.23 IC2A.17 IC2B.17 IC3.2 IC4.4 IC4.5 IC4.6 IC4.7 IC5.9 IC5.23 IC6.3 IC6.6 IC6.9 IC7.1 J7.2 J8.2 J9.2 J10.2 J11.2 J12.2 J13.1 J13.2 J13.23 J13.24 J13.29 J13.30 J13.35 J13.36 J16.2 J17.2 J18.2 J19.2 J20.2 J21.2 J22.2 J23.2 R3.1 R4.1 R13A.1 R13B.1 R16A.1 R16B.1 R44.2 R45.2 R48.2 R49.2 R50.2 R51.2 R52.2 R53.2 R54.2 R55.2 SW1.3 SW1.4 SW2.9 SW2.10 SW2.11 SW2.12 SW2.13 SW2.14 SW2.15 SW2.16 T3.2 T4.2 T5.2 T6.2 T7.2 T8.2 T9.2 T10.2 T11.2 T12.2 TR1A.3 TR1B.3 | length 83.3
  Component Side w0.152: v1(19.346,-18.344) v1@19.404,-18.286
  Component Side w0.381: v1@43.953,-14.461 v1(43.98,-14.461) ; v1(48.352,-1.73) TR1A.3@49.91,-1.73 ; TR1B.3@48.96,-22.23 v1(50.204,-22.23) ; IC3.2@58.829,-13.533 v1(59.739,-13.533) ; 60.323,-24.074 60.298,-24.099 60.348,-24.15 ; IC6.3@65.135,-27.15 65.135,-25.135 IC6.9@64.5,-24.5 65.135,-23.865 IC6.6@65.135,-21.85 ; J23.2@66.775,-14.244 v2(66.783,-14.253) ; J23.2@66.825,-18.935 J23.2@66.91,-18.85 ; IC7.1@70.2,-26.05 71,-26.05 71.372,-26.422 v1(71.372,-27.046) ; J16.2@72.82,-2.154 J16.2@72.999,-2.154 ; v1(73.353,-14.701) 73.417,-14.765 74.608,-14.765 J13.30@74.7,-14.857 v1(75.89,-14.857) ; v1(73.455,-16.987) 73.588,-16.855 74.608,-16.855 J13.36@74.7,-16.762 v1(75.84,-16.762) ; v1@73.614,-5.481 73.9,-5.767 74.5,-5.767 J13.2@74.7,-5.967 v1(75.737,-5.967) ; J13.24@74.7,-12.952 v1(75.94,-12.952) ; v1(75.055,-23.591) R4.1@75.055,-22.944 ; v1(77.189,-12.974) 78.278,-12.974 J13.23@78.3,-12.952 ; v1(77.21,-14.857) J13.29@78.3,-14.857 ; v1(77.214,-16.835) 78.227,-16.835 J13.35@78.3,-16.762 ; v1(77.69,-5.31) 77.69,-5.958 77.7,-5.967 J13.1@78.3,-5.967 78.64,-5.967 78.865,-5.742 v1(78.865,-5.38) ; v1(77.874,-23.591) R3.1@77.874,-22.944
  Solder Side w0.152: v1(11.276,-11.704) 11.276,-11.857 11.301,-11.882 R49.2@11.301,-12.53 ; IC5.9@18.483,-18.058 19.037,-18.058 v1@19.312,-18.334 ; v1(63.066,0.539) 63.121,0.539 v1@63.144,0.562 ; v1(63.138,-5.385) 63.178,-5.345 63.178,-4.271 IC1.9@63.138,-4.231 ; 63.3,0.406 63.638,0.068 IC1.23@63.638,-0.331
  Solder Side w0.254: R45.2@1.903,-13.139 3.09,-13.139 T5.2@3.264,-13.314 ; v1(4.037,-15.565) 4.037,-13.861 v1(4.329,-13.569) ; v1(13.663,-17.419) 13.79,-17.546 14.443,-17.546 IC5.23@14.456,-17.533 ; T8.2@17.463,-13.258 17.96,-13.258 18.146,-13.444 R51.2@18.146,-14.524 ; T9.2@21.059,-13.24 21.059,-14.033 R52.2@21.601,-14.574 ; T10.2@24.753,-13.284 24.753,-14.044 R53.2@25.309,-14.6 ; v1(60.841,0.266) 60.841,0.219 60.552,-0.071 60.552,-0.921 60.662,-1.031 IC1.18@60.938,-1.031 ; C10.1@64.558,0.767 64.608,0.716 v1(65.378,0.716)
  Solder Side w0.381: v1(8.761,-17.292) 8.761,-18.067 R44.2@8.85,-18.156 ; C12.1@13.46,-17.979 13.663,-17.776 v1(13.663,-17.419) ; v1(28.675,-17.495) 28.908,-17.262 IC4.6@29.777,-17.262 ; R54.2@29.043,-14.651 29.043,-13.597 v1(29.106,-13.533) ; IC4.5@29.777,-17.912 IC4.6@29.777,-17.262 ; IC4.7@29.777,-16.612 IC4.6@29.777,-17.262 ; T12.2@32.195,-13.309 32.726,-13.84 R55.2@32.726,-14.676 ; v1(33.11,-17.912) IC4.4@34.177,-17.912 ; v1(35.736,-17.953) 35.888,-17.8 R13A.1@36.53,-17.8 ; v1(35.746,-20.3) R16A.1@36.53,-20.3 ; R16B.1@36.5,-9.5 36.5,-9.729 v1(36.907,-10.136) ; R13B.1@36.5,-7 v1(36.5,-6.347) ; v1(42.772,-23.287) 42.785,-23.3 C9A.1@43.55,-23.3 C7A.1@43.55,-22.3 ; v1(42.89,-12.5) C9B.1@43.52,-12.5 ; C7B.1@43.52,-11.5 v1(43.52,-10.7) ; v1(43.52,-6.153) C3B.1@43.52,-5.5 C1B.1@43.52,-4.5 43.52,-3.514 v1(43.559,-3.475) ; v1(43.55,-16.953) C3A.1@43.55,-16.3 ; C1A.1@43.55,-15.3 43.55,-14.692 43.782,-14.461 v1(43.98,-14.461) ; C2B.1@45.769,-3.157 v1(45.769,-2.078) ; v1(47.3,-23.7) C8A.1@47.3,-22.8 ; C8B.1@47.331,-12.288 v1(48.207,-12.288) ; C2A.1@47.8,-16.3 v1(48.59,-16.3) ; v1(48.868,-6.421) 48.868,-6.948 C6B.1@48.92,-7 ; C6A.1@48.95,-17.8 48.95,-17.389 v1@49.224,-17.115 ; C27.1@70.37,-25.98 70.37,-26.044 v1(71.372,-27.046) 71.347,-27.071 v1(71.347,-27.986) ; v1@77.168,-12.974 v1(77.189,-12.974)
  Solder Side w0.508: T7.2@13.769,-13.24 13.769,-12.524 v1(14.36,-11.933) 14.513,-11.78 v1(14.959,-11.78) v1(15.492,-11.78) v1(16,-11.78) v1(16.508,-11.78) v1(17.016,-11.78) v1(17.524,-11.78) ; T8.2@17.463,-13.258 v1@17.463,-11.923 ; T9.2@21.059,-13.24 21.059,-12.524 v1(21.65,-11.933) 21.803,-11.78 v1(22.248,-11.78) v1(22.782,-11.78) v1(23.29,-11.78) v1(23.798,-11.78) v1(24.306,-11.78) 24.611,-11.78 24.753,-11.923 T10.2@24.753,-13.284
  Solder Side w0.762: 31.215,-12.187 32.195,-13.167 T12.2@32.195,-13.309
  other v1: 71.372,-27.528 67.181,-26.258 67.181,-25.776 67.181,-25.293 65.555,-25.242 64.489,-25.192 63.549,-25.166 64,-24.5 65,-24.5 63.523,-23.998 64.438,-23.947 65.581,-23.947 45.032,-19.756 45.921,-19.756 45.896,-19.299 45.032,-19.248 49.223,-17.114 57.173,-17.038 58.723,-17.013 4.05,-16.058 4.558,-16.058 13.612,-15.692 14.197,-15.692 4.545,-15.565 7.072,-15.296 61.339,-15.26 13.612,-15.209 14.171,-15.209 7.059,-14.803 13.612,-14.701 3.046,-14.625 7.059,-14.32 7.059,-13.838 2.589,-13.584 3.821,-13.569 29.589,-13.533 2.576,-13.091 3.808,-13.076 4.316,-13.076 29.106,-13.05 29.589,-13.05 29.132,-12.542 29.614,-12.542 30.148,-12.161 30.605,-12.161 29.132,-12.06 29.614,-12.06 24.814,-11.78 61.441,-10.637 61.481,-9.931 45.921,-8.936 45.108,-8.885 45.159,-8.377 45.87,-8.351 66.343,-5.938 67.105,-5.913 73.81,-5.557 67.13,-5.253 73.937,-3.779
  other v2: 58.077,-27.813 56.858,-27.483 59.55,-26.5 56.82,-25.5 14.135,-25.247 59.445,-25.117 58.128,-24.892 29.421,-24.556 22.085,-24.333 -6.134,-24.028 41.237,-24.003 5.22,-23.241 0.902,-23.215 -1.588,-23.165 69.278,-23.165 71.717,-23.114 39.916,-22.911 -7.353,-22.885 22.009,-22.631 13.881,-22.403 38.062,-22.377 69.05,-22.276 29.477,-22.174 71.844,-22.123 58.534,-21.945 -3.645,-21.717 1.003,-21.717 5.22,-21.717 56.883,-21.59 39.535,-21.463 69.456,-21.412 71.412,-21.336 59.372,-21.209 69.532,-20.523 60.1,-20.5 34.049,-20.345 52.159,-20.345 31.636,-20.218 57.213,-19.202 58.433,-18.974 32.601,-18.737 56.401,-18.516 59.4,-18.422 69.557,-18.264 69.558,-17.577 71.59,-17.45 65.824,-17.373 63.182,-17.145 69.151,-16.738 71.92,-16.408 66.246,-16.224 62.192,-15.926 69.278,-15.773 71.361,-15.341 69.863,-15.24 62.268,-14.275 71.107,-11.43 69.634,-11.277 63.513,-11.074 50.863,-10.795 65.722,-10.769 71.869,-10.617 47.155,-10.414 68.974,-10.236 63.106,-10.033 59.093,-9.525 54.165,-9.499 65.875,-9.449 71.844,-9.347 63.513,-8.991 69.355,-8.966 64.96,-8.56 69.609,-8.001 54.496,-7.417 58.712,-7.264 56.879,-7.102 33.49,-7.036 34.658,-6.197 59.55,-6 69.583,-5.943 32.169,-5.918 -1.156,-5.893 10.858,-5.893 15.126,-5.867 5.956,-5.842 20.129,-5.816 28.181,-5.816 47.333,-5.461 -5.474,-5.385 50.762,-5.385 71.26,-5.385 56.879,-4.909 69.355,-4.902 59.093,-4.775 57.721,-4.47 33.007,-4.292 -6.185,-4.064 68.999,-4.064 -3.467,-3.632 10.884,-3.607 26.276,-3.607 -2.4,-3.581 5.982,-3.581 15.365,-3.499 20.206,-3.505 69.253,-3.175 70.117,-2.591 57.772,-1.549 58.61,-1.524 56.731,-1.143 56.879,1.091 58.941,1.27 57.874,1.55
LO_IN_N: J22.1 R17.2 | length 2.8
  Solder Side w0.203: R17.2@64.514,-12.758 64.514,-10.003 J22.1@64.517,-10
LO_IN_P: J23.1 R17.1 | length 2.8
  Solder Side w0.203: R17.1@64.514,-13.698 64.514,-16.498 J23.1@64.517,-16.5
MEZZ_IO0: IC1.1 J13.3 | length 22.3
  Component Side w0.152: v1(65.581,-0.579) 65.856,-0.304 65.856,1.322 66.847,2.313 73.56,2.313 74.521,1.352 74.521,-1.686 77.212,-4.376 77.212,-6.203 77.612,-6.602 J13.3@78.3,-6.602
  Solder Side w0.152: IC1.1@64.838,-1.031 65.129,-1.031 v1(65.581,-0.579)
MEZZ_IO1: IC1.2 J13.4 | length 17.3
  Component Side w0.152: v1(65.073,-0.122) 65.073,-0.757 65.657,-1.341 v1(65.632,-1.366) ; v1(73.56,-6.602) J13.4@74.7,-6.602
  Solder Side w0.152: IC1.2@64.838,-1.531 65.467,-1.531 v1(65.632,-1.366) ; v1(65.073,-0.122) 65.094,-0.1 65.779,-0.1 65.966,-0.287 71.436,-0.287 72.693,-1.544 72.693,-1.847 73.459,-2.613 73.459,-5.164 73.315,-5.308 73.315,-5.739 73.56,-5.984 v1(73.56,-6.602)
MEZZ_IO2: IC1.3 J13.5 | length 23.4
  Component Side w0.152: v1(66.135,-0.947) 66.161,-0.921 66.161,0.839 67.329,2.008 73.433,2.008 74.217,1.225 74.217,-1.812 76.907,-4.502 76.907,-6.564 77.581,-7.237 J13.5@78.3,-7.237
  Solder Side w0.152: IC1.3@64.838,-2.031 65.755,-2.031 66.135,-1.65 v1(66.135,-0.947)
MEZZ_IO3: IC1.4 J13.6 | length 16.1
  Component Side w0.152: v1(73.506,-7.259) 74.678,-7.259 J13.6@74.7,-7.237
  Solder Side w0.152: IC1.4@64.838,-2.531 64.856,-2.513 65.755,-2.513 67.638,-0.63 71.339,-0.63 72.388,-1.678 72.388,-1.974 73.154,-2.74 73.154,-5.038 73.01,-5.181 73.01,-6.764 v1(73.506,-7.259)
MEZZ_IO4: IC1.5 J13.7 | length 24
  Component Side w0.152: v1(65.708,-2.992) 65.708,-2.031 65.728,-2.031 66.614,-1.146 66.614,0.606 67.71,1.703 73.23,1.703 73.912,1.021 73.912,-1.938 76.602,-4.629 76.602,-6.841 77.271,-7.51 77.271,-7.532 77.612,-7.872 J13.7@78.3,-7.872
  Solder Side w0.152: IC1.5@64.838,-3.031 65.669,-3.031 v1(65.708,-2.992)
MEZZ_IO5: IC1.6 J13.8 | length 16.9
  Component Side w0.152: v1(73.506,-7.92) 74.653,-7.92 J13.8@74.7,-7.872
  Solder Side w0.152: IC1.6@64.838,-3.531 65.88,-3.531 66.394,-3.017 66.394,-2.662 68.019,-1.036 71.315,-1.036 72.083,-1.805 72.083,-2.1 72.849,-2.866 72.849,-4.911 72.706,-5.055 72.706,-7.136 73.489,-7.92 v1(73.506,-7.92)
MEZZ_IO6: IC1.7 J13.9 | length 25.5
  Component Side w0.152: v1(64.902,-4.281) 65.257,-4.281 66.241,-3.297 66.241,-1.951 66.919,-1.273 66.919,0.378 67.939,1.398 73.027,1.398 73.607,0.818 73.607,-2.064 76.297,-4.755 76.297,-7.238 77.567,-8.507 J13.9@78.3,-8.507
  Solder Side w0.152: IC1.7@64.138,-4.231 64.188,-4.281 v1(64.902,-4.281)
MEZZ_IO7: IC1.8 J13.10 | length 19.6
  Component Side w0.152: v1(73.506,-8.58) 74.628,-8.58 J13.10@74.7,-8.507
  Solder Side w0.152: IC1.8@63.638,-4.231 63.638,-4.77 63.842,-4.973 64.955,-4.973 65.103,-4.825 65.424,-4.825 67.105,-3.144 67.105,-2.459 68.222,-1.341 71.172,-1.341 71.778,-1.947 71.778,-2.226 72.544,-2.992 72.544,-4.785 72.401,-4.929 72.401,-7.492 73.307,-8.398 73.324,-8.398 v1(73.506,-8.58)
MEZZ_IO8: IC1.10 J13.11 | length 28.8
  Component Side w0.152: v1(62.7,-4.877) 62.7,-4.882 62.676,-4.906 65.022,-4.906 65.103,-4.825 65.247,-4.825 66.648,-3.424 66.648,-2.027 67.283,-1.392 67.283,0.132 68.07,0.92 v1(72.642,0.92) ; v1(77.16,-9.142) J13.11@78.3,-9.142
  Solder Side w0.152: IC1.10@62.638,-4.231 62.638,-4.901 62.663,-4.877 v1(62.7,-4.877) ; v1(72.642,0.92) 72.646,0.916 73.586,0.916 74.521,-0.02 74.521,-1.027 75.973,-2.479 76.447,-2.479 77.16,-3.192 v1(77.16,-9.142)
MEZZ_IO9: IC1.11 J13.12 | length 22.2
  Component Side w0.152: v1(73.506,-9.24) 74.602,-9.24 J13.12@74.7,-9.142
  Solder Side w0.152: IC1.11@62.138,-4.231 62.138,-5.078 62.297,-5.236 62.365,-5.236 62.645,-5.517 62.645,-5.584 62.772,-5.711 62.924,-5.863 63.337,-5.863 63.897,-5.303 65.056,-5.303 65.229,-5.13 65.628,-5.13 67.511,-3.246 67.511,-2.611 68.476,-1.646 71.045,-1.646 71.473,-2.074 71.473,-2.352 72.24,-3.119 72.24,-4.659 72.096,-4.803 72.096,-7.618 72.441,-7.963 72.441,-8.227 73.455,-9.24 v1(73.506,-9.24)
MEZZ_IO10: IC1.12 J13.13 | length 30.5
  Component Side w0.152: v3(62.166,-5.715) 62.79,-5.715 62.791,-5.714 62.94,-5.863 63.337,-5.863 63.842,-5.358 65.001,-5.358 65.229,-5.13 65.475,-5.13 67.029,-3.576 67.029,-2.078 67.638,-1.468 67.638,-0.35 68.426,0.437 v1(73.125,0.437) ; v1(77.036,-9.799) 78.278,-9.799 J13.13@78.3,-9.777
  Solder Side w0.152: IC1.12@61.638,-4.231 61.638,-5.111 62.166,-5.639 v3(62.166,-5.715) ; v1(73.125,0.437) 73.585,-0.023 73.686,-0.023 74.217,-0.554 74.217,-1.153 75.847,-2.783 76.32,-2.783 76.833,-3.296 76.833,-8.793 76.682,-8.944 76.682,-9.445 v1(77.036,-9.799)
MEZZ_IO11: IC1.13 J13.14 | length 24.8
  Component Side w0.152: v3(62.243,-6.375) 62.425,-6.192 63.609,-6.192 64.138,-5.663 65.373,-5.663 v3(65.428,-5.608) ; v1@73.56,-9.777 J13.14@74.7,-9.777
  Solder Side w0.152: IC1.13@60.938,-3.531 60.938,-5.284 61.539,-5.885 61.592,-5.885 61.9,-6.193 62.112,-6.193 62.243,-6.324 v3(62.243,-6.375) ; v3(65.428,-5.608) 65.759,-5.608 67.994,-3.373 67.994,-2.625 68.662,-1.957 70.892,-1.957 71.169,-2.234 71.169,-2.479 71.935,-3.245 71.935,-4.533 71.791,-4.676 71.791,-7.744 72.05,-8.003 72.05,-8.462 73.307,-9.719 73.324,-9.719 v1(73.506,-9.901)
MEZZ_IO12: IC1.14 J13.15 | length 34.1
  Component Side w0.152: v1(76.985,-10.46) 78.253,-10.46 J13.15@78.3,-10.412
  Solder Side w0.152: IC1.14@60.938,-3.031 60.362,-3.031 59.155,-1.824 59.155,0.666 60.929,2.44 65.661,2.44 67.143,0.958 71.918,0.958 73.912,-1.036 73.912,-1.279 75.721,-3.088 76.163,-3.088 76.521,-3.446 76.521,-8.511 76.35,-8.682 76.35,-9.825 v1(76.985,-10.46)
MEZZ_IO13: IC1.15 J13.16 | length 32.1
  Component Side w0.152: v1(61.263,1.961) 61.263,0.767 v1(61.339,0.691) ; v1@73.604,-10.412 J13.16@74.7,-10.412
  Solder Side w0.152: IC1.15@60.938,-2.531 60.374,-2.531 59.485,-1.642 59.485,0.523 60.923,1.961 v1(61.263,1.961) ; v1@61.339,0.666 61.551,0.666 62.389,1.504 65.304,1.504 66.79,0.018 71.562,0.018 71.943,-0.363 ; 71.944,-0.363 72.997,-1.417 72.997,-1.721 74.416,-3.14 74.416,-9.676 v1(73.531,-10.561)
MEZZ_IO14: IC1.16 J13.17 | length 33.5
  Component Side w0.152: v1(76.046,-10.197) 76.833,-10.984 J13.17@78.092,-10.984
  Solder Side w0.152: IC1.16@60.938,-2.031 60.348,-2.031 59.815,-1.497 59.815,0.422 60.875,1.482 61.471,1.482 62.102,2.113 65.556,2.113 67.029,0.64 71.804,0.64 73.607,-1.163 73.607,-1.405 75.595,-3.393 75.761,-3.393 76.216,-3.848 76.216,-8.385 76.046,-8.555 v1(76.046,-10.197) 76.787,-10.938 ; 76.787,-10.938 76.99,-10.938 77.071,-11.018 76.969,-11.12 76.787,-10.938
MEZZ_IO15: IC1.17 J13.18 | length 29.8
  Component Side w0.152: v1(73.531,-11.247) 73.731,-11.047 J13.18@74.7,-11.047
  Solder Side w0.152: IC1.17@60.938,-1.531 60.374,-1.531 60.196,-1.353 60.196,0.372 61.001,1.178 61.597,1.178 62.228,1.809 65.43,1.809 66.903,0.335 71.677,0.335 73.302,-1.29 73.302,-1.595 74.721,-3.013 74.721,-10.057 v1(73.531,-11.247)
N5V0A: C7A.2 C7B.2 C8A.2 C8B.2 C9A.2 C9B.2 C27.2 IC2A.13 IC2A.14 IC2A.15 IC2A.16 IC2B.13 IC2B.14 IC2B.15 IC2B.16 IC7.5 | length 78
  Component Side w0.305: v1(48.842,-20.924) 48.965,-21.047 49.707,-21.047 50.032,-20.722 50.032,-20.568 52.419,-18.181 54.621,-18.181 55.446,-17.356 55.446,-16.225 53.16,-13.939 53.16,-13.152 v1(51.789,-11.78) ; IC7.5@72.8,-26.05 73,-26.25 v1(73,-27)
  Solder Side w0.305: IC2B.16@44.72,-9.95 44.72,-10.873 ; IC2A.16@44.75,-20.75 44.702,-20.798 44.702,-21.686 ; IC2B.15@45.22,-9.95 45.22,-10.825 45.235,-10.841 ; IC2A.15@45.25,-20.75 45.25,-21.672 45.235,-21.686 ; C8A.2@45.7,-22.8 45.2,-23.3 C9A.2@44.45,-23.3 C7A.2@44.45,-22.3 44.702,-22.048 44.702,-21.686 ; IC2B.14@45.72,-9.95 45.72,-10.813 45.693,-10.841 ; IC2A.14@45.75,-20.75 45.75,-21.642 45.794,-21.686 ; IC2B.13@46.22,-9.95 46.22,-10.567 45.947,-10.841 45.693,-10.841 ; IC2A.13@46.25,-20.75 46.25,-21.586 46.15,-21.686 45.794,-21.686 ; 47.382,-25.509 48.842,-24.049 v1(48.842,-20.924) ; v1(51.789,-11.78) 49.325,-11.78 48.842,-11.298 46.644,-11.298 45.731,-12.211 C8B.2@45.731,-12.288 45.546,-12.474 44.446,-12.474 C9B.2@44.42,-12.5 C7B.2@44.42,-11.5 44.677,-11.243 44.677,-10.917 44.72,-10.873 ; C27.2@72.15,-26.15 v1(73,-27) ; 44.702,-21.686 45.235,-21.686 ; 44.72,-10.873 44.753,-10.841 45.235,-10.841 ; 45.235,-21.686 45.794,-21.686 ; 45.235,-10.841 45.693,-10.841
  Solder Side w0.381: C8A.2@45.7,-22.8 45.7,-23.827 47.382,-25.509 50.364,-28.491 67.567,-28.491 67.773,-28.697 71.703,-28.697 72.15,-28.25 72.15,-26.15 C27.2@72.15,-26